# EAGLE board mainboard (EAGLE 7.7.0)
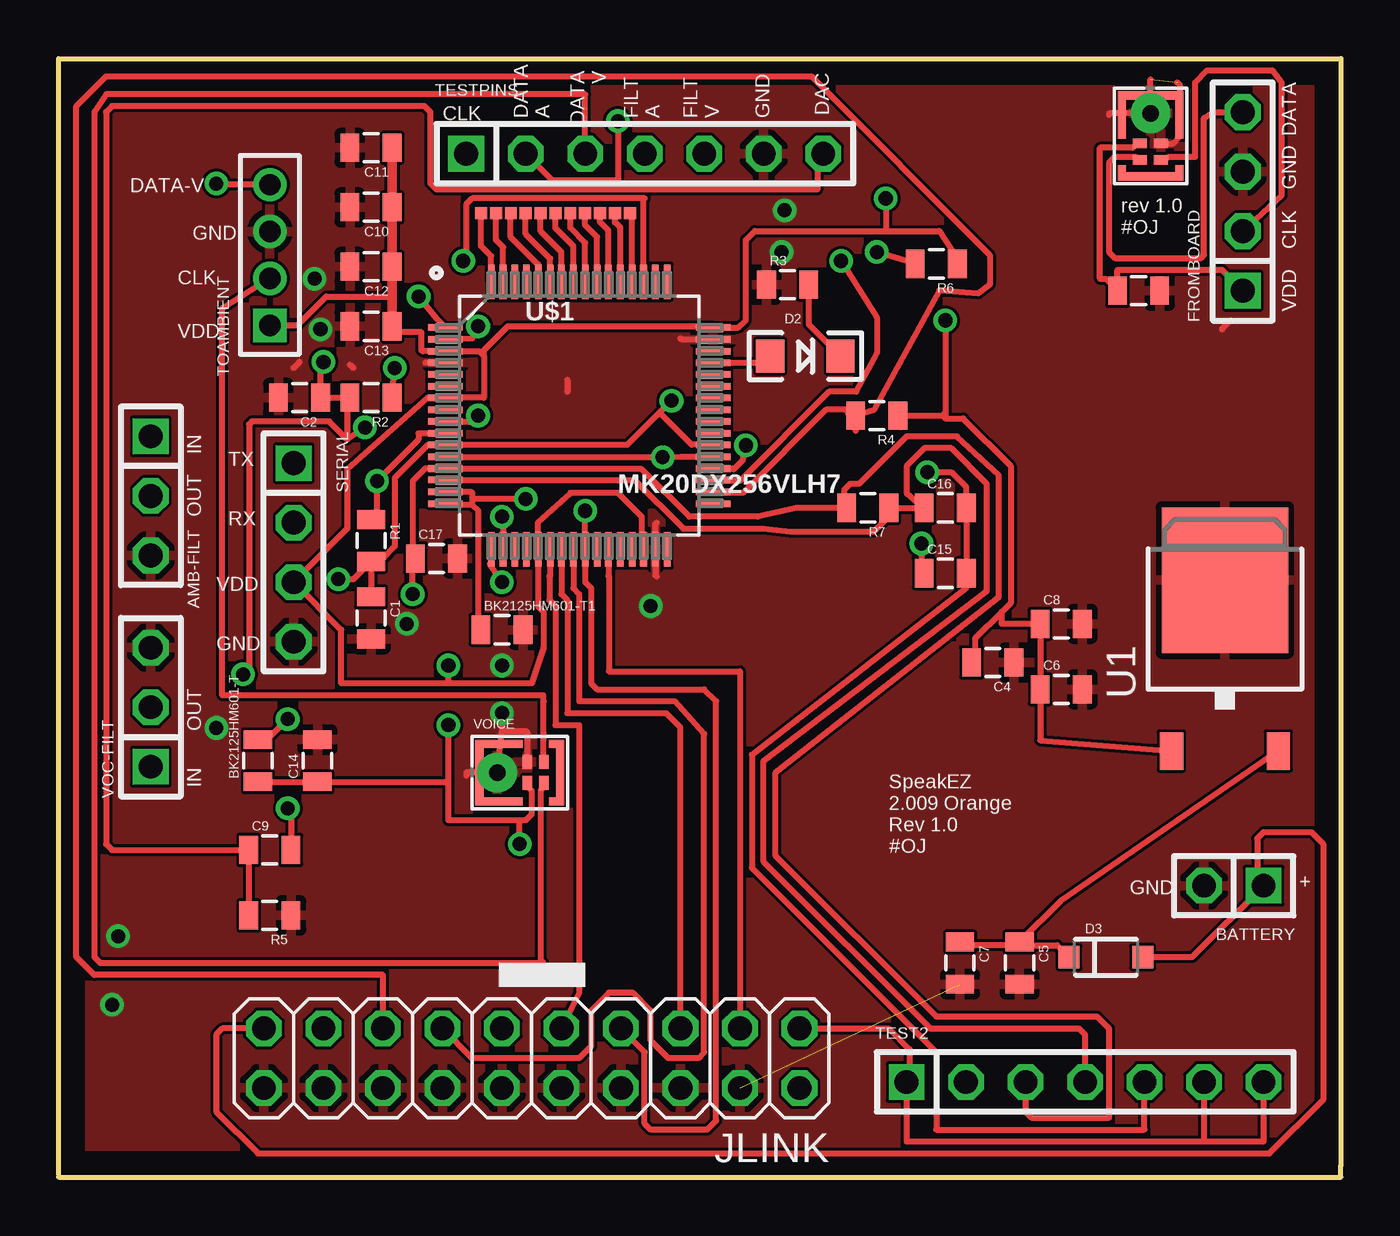
[diagram p0: board, top side]
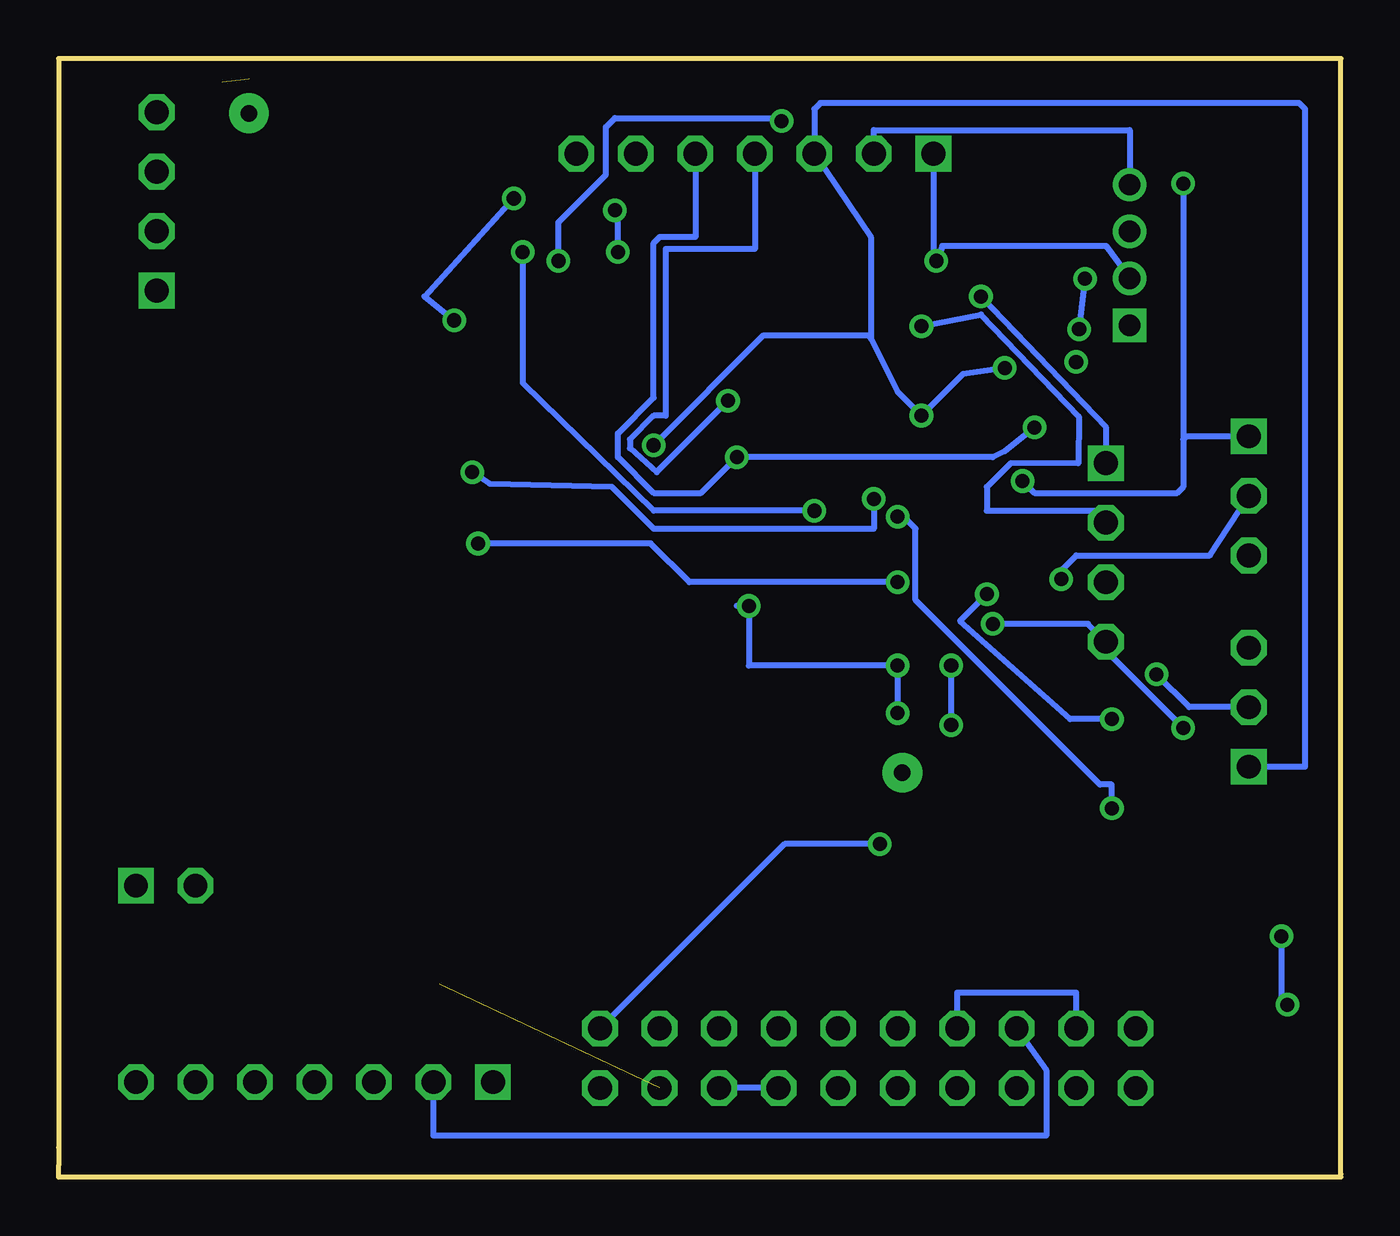
[diagram p1: board, bottom side, seen from below]

Size 54.74 x 47.75 mm. Coordinates in mm from the lower left corner, seen from the top.
Outline: 0,0.13 0,47.75 54.74,47.75 54.74,1.27 54.74,0.51 54.74,0 0,0
Copper layers (1*16): Top 0.035mm / dielectric 1.5mm / Bottom 0.035mm
Design rules "default *": minimum track width 10mil, minimum drill 15mil, track to track 5mil, track to pad 5mil, pad to pad 5mil, via to via 5mil, smd to smd 5mil, copper to edge 40mil, drill to drill 8mil, minimum pad ring 10mil, minimum via ring 8mil, stop-mask expansion 4mil, vias tented up to drill 0mil, thermal gap 10mil

## Footprints (pad centres in the part's own frame; a part is rotated, then mirrored left to right if it is on the bottom)
1X03 = drill 1.016 square: 1 -2.54,0 | drill 1.016 octagon: 2 0,0; 3 2.54,0
ADMP621ACEZ-RL7-RECT = smd 0.4 x 0.6: 1 1.025,0.45; 2 0.325,0.45; 4 0.325,-0.45; 5 1.025,-0.45 | smd 0.051 x 0.051: 3 -1.727,0 | smd 0.35 x 2.1: GND@1 1.725,0; GND@6 -1.725,0 | smd 0.65 x 0.35: GND@2 1.575,1.225; GND@3 1.575,-1.225 | smd 2.025 x 0.35: GND@4 -0.887,-1.225; GND@5 -0.887,1.225 | drill 0.7 pad 1.7: GND@7 -0.965,0
1X02 = drill 1.016 square: 1 -1.27,0 | drill 1.016 octagon: 2 1.27,0
0805 = smd 0.8 x 1.2: 1 -0.9,0; 2 0.9,0
LED-1206 = smd 1.2 x 1.4: A -1.5,0; C 1.5,0
SOD-123 = smd 0.9 x 0.95: A 1.575,0; C -1.575,0
1X04 = drill 1.016 square: 1 -3.81,0 | drill 1.016 octagon: 2 -1.27,0; 3 1.27,0; 4 3.81,0
2X10 = drill 1.016 octagon: 1 -11.43,-1.27; 2 -11.43,1.27; 3 -8.89,-1.27; 4 -8.89,1.27; 5 -6.35,-1.27; 6 -6.35,1.27; 7 -3.81,-1.27; 8 -3.81,1.27; 9 -1.27,-1.27; 10 -1.27,1.27; 11 1.27,-1.27; 12 1.27,1.27; 13 3.81,-1.27; 14 3.81,1.27; 15 6.35,-1.27; 16 6.35,1.27; 17 8.89,-1.27; 18 8.89,1.27; 19 11.43,-1.27; 20 11.43,1.27
1X07 = drill 1.016 square: 1 -7.62,0 | drill 1.016 octagon: 2 -5.08,0; 3 -2.54,0; 4 0,0; 5 2.54,0; 6 5.08,0; 7 7.62,0
1X04M = drill 0.914 square: 1 -3,0 | drill 0.914: 2 -1,0; 3 1,0; 4 3,0
PAD.02X.02 = smd 0.508 x 0.508: P$1 0,0
TO-252 = smd 1 x 1.6: 1 -2.28,-4.8; 2 2.28,-4.8 | smd 5.4 x 6.2: 3 0,2.5
QFP50P1200X1200X160-64N = smd 1.473 x 0.279: 1 -5.715,3.759; 2 -5.715,3.251; 3 -5.715,2.743; 4 -5.715,2.261; 5 -5.715,1.753; 6 -5.715,1.245; 7 -5.715,0.762; 8 -5.715,0.254; 9 -5.715,-0.254; 10 -5.715,-0.762; 11 -5.715,-1.245; 12 -5.715,-1.753; 13 -5.715,-2.261; 14 -5.715,-2.743; 15 -5.715,-3.251; 16 -5.715,-3.759; 33 5.715,-3.759; 34 5.715,-3.251; 35 5.715,-2.743; 36 5.715,-2.261; 37 5.715,-1.753; 38 5.715,-1.245; 39 5.715,-0.762; 40 5.715,-0.254; 41 5.715,0.254; 42 5.715,0.762; 43 5.715,1.245; 44 5.715,1.753; 45 5.715,2.261; 46 5.715,2.743; 47 5.715,3.251; 48 5.715,3.759 | smd 0.279 x 1.473: 17 -3.759,-5.715; 18 -3.251,-5.715; 19 -2.743,-5.715; 20 -2.261,-5.715; 21 -1.753,-5.715; 22 -1.245,-5.715; 23 -0.762,-5.715; 24 -0.254,-5.715; 25 0.254,-5.715; 26 0.762,-5.715; 27 1.245,-5.715; 28 1.753,-5.715; 29 2.261,-5.715; 30 2.743,-5.715; 31 3.251,-5.715; 32 3.759,-5.715; 49 3.759,5.715; 50 3.251,5.715; 51 2.743,5.715; 52 2.261,5.715; 53 1.753,5.715; 54 1.245,5.715; 55 0.762,5.715; 56 0.254,5.715; 57 -0.254,5.715; 58 -0.762,5.715; 59 -1.245,5.715; 60 -1.753,5.715; 61 -2.261,5.715; 62 -2.743,5.715; 63 -3.251,5.715; 64 -3.759,5.715

## Placement (x,y rotation side)
AMB-FILT  [1X03]  3.94,29.08 270 top
AMBIENT  ADMP621ACEZ-RL7-RECT  [ADMP621ACEZ-RL7-RECT]  46.61,44.45 270 top
BATTERY  [1X02]  50.16,12.45 180 top
BK2125HM601-T  [0805]  8.51,17.78 90 top
BK2125HM601-T1  [0805]  18.92,23.37 0 top
C1  100pf  [0805]  13.34,23.88 270 top
C2  100pf  [0805]  10.29,33.27 180 top
C3  0.1uF  [0805]  46.1,37.85 0 top
C4  0.1uF  [0805]  39.88,21.97 180 top
C5  2.2uF  [0805]  41.02,9.14 270 top
C6  2.2uF  [0805]  42.8,20.83 0 top
C7  0.1uF  [0805]  38.48,9.14 270 top
C8  0.1uF  [0805]  42.8,23.62 0 top
C9  [0805]  9.02,13.97 0 top
C10  0.1uF  [0805]  13.34,41.4 180 top
C11  0.1uF  [0805]  13.34,43.94 180 top
C12  0.1uF  [0805]  13.34,38.86 180 top
C13  2.2uF  [0805]  13.34,36.32 180 top
C14  0.1uF  [0805]  11.05,17.78 90 top
C15  0.1uF  [0805]  37.85,25.78 0 top
C16  0.1uF  [0805]  37.85,28.57 0 top
C17  2.2uF  [0805]  16.13,26.42 0 top
D2  [LED-1206]  31.88,35.05 0 top
D3  1N5819HW-7-F  [SOD-123]  44.7,9.4 0 top
FROMBOARD  [1X04]  50.55,41.66 90 top
JLINK  JLINK  [2X10]  20.19,5.08 180 top
R1  5kohm  [0805]  13.34,27.18 270 top
R2  5kohm  [0805]  13.34,33.27 180 top
R3  66 ohms  [0805]  31.11,38.1 0 top
R4  10k  [0805]  34.92,32.51 180 top
R5  50k  [0805]  9.02,11.18 180 top
R6  100k  [0805]  37.47,38.99 180 top
R7  470  [0805]  34.54,28.57 180 top
SERIAL  [1X04]  10.03,26.67 270 top
TEST2  [1X07]  43.81,4.06 0 top
TESTPINS  [1X07]  25.02,43.69 0 top
TOAMBIENT  [1X04M]  9.02,39.37 90 top
TP1  TEST-POINT2  [PAD.02X.02]  23.11,41.15 0 top
TP2  TEST-POINT2  [PAD.02X.02]  22.48,41.15 90 top
TP3  TEST-POINT2  [PAD.02X.02]  21.84,41.15 90 top
TP4  TEST-POINT2  [PAD.02X.02]  21.21,41.15 90 top
TP5  TEST-POINT2  [PAD.02X.02]  20.57,41.15 90 top
TP6  TEST-POINT2  [PAD.02X.02]  23.75,41.15 90 top
TP7  TEST-POINT2  [PAD.02X.02]  24.38,41.15 90 top
TP8  TEST-POINT2  [PAD.02X.02]  19.94,41.15 90 top
TP9  TEST-POINT2  [PAD.02X.02]  19.3,41.15 90 top
TP10  TEST-POINT2  [PAD.02X.02]  18.03,41.15 90 top
TP11  TEST-POINT2  [PAD.02X.02]  18.67,41.15 90 top
U1  +12v  [TO-252]  49.78,22.99 0 top
U$1  MK20DX256VLH7  [QFP50P1200X1200X160-64N]  22.23,32.51 0 top
VOC-FILT  [1X03]  3.94,20.07 90 top
VOICE  ADMP621ACEZ-RL7-RECT  [ADMP621ACEZ-RL7-RECT]  19.68,17.27 0 top

## Library data of the parts
AMB-FILT BATTERY FROMBOARD JLINK SERIAL TEST2 TESTPINS TOAMBIENT VOC-FILT = pinhead
AMBIENT VOICE = InvenSense-INMP621ACEZ-R7-rect; MPN: ADMP621ACEZ-RL7; OC_FARNELL: 2361525; OC_NEWARK: 08X1061; PACKAGE: 5LGA; SUPPLIER: ANALOG DEVICES
BK2125HM601-T BK2125HM601-T1 R1-R7 TP1-TP11 = SparkFun-Passives
C1-C17 = SparkFun-Capacitors
D2 = SparkFun-LED
D3 = SparkFun-DiscreteSemi
U1 = LP38691; PROD_ID: VREG-12370
U$1 = Teensy_DIY_v1.0

## Nets
+5V: BATTERY.1 D3.A JLINK.19
CLK: TESTPINS.1 TOAMBIENT.2 U$1.51 VOICE.1
CLK2-A: AMBIENT.1 FROMBOARD.2
DATA: R2.1 TESTPINS.3 U$1.9 U$1.36 VOC-FILT.1 VOICE.5
DATA2: AMB-FILT.1 R1.1 TESTPINS.2 TOAMBIENT.4 U$1.10 U$1.35
DATA2-A: AMBIENT.5 FROMBOARD.4
GND: AMB-FILT.3 AMBIENT.2 AMBIENT.3 AMBIENT.GND@7 BATTERY.2 BK2125HM601-T1.2 C1.2 C2.2 C3.2 C4.1 C5.2 C6.2 C7.2 C8.2 C10.2 C11.2 C12.2 C13.2 C14.2 C17.2 FROMBOARD.3 JLINK.4 JLINK.6 JLINK.8 JLINK.10 JLINK.12 JLINK.14 JLINK.16 JLINK.18 JLINK.20 R3.1 R5.1 SERIAL.4 TESTPINS.6 TOAMBIENT.3 U1.3 U$1.4 U$1.31 U$1.47 VOC-FILT.3 VOICE.2 VOICE.3 VOICE.GND@7
N$1: AMB-FILT.2 C1.1 R1.2 TESTPINS.4 U$1.11 U$1.38
N$2: C2.1 R2.2 TESTPINS.5 U$1.12 U$1.37 VOC-FILT.2
N$3: TP7.P$1 U$1.52
N$4: TP6.P$1 U$1.53
N$5: TP1.P$1 U$1.54
N$6: TP2.P$1 U$1.55
N$7: TP3.P$1 U$1.56
N$8: TP4.P$1 U$1.57
N$9: TP5.P$1 U$1.58
N$10: TP8.P$1 U$1.59
N$12: TP9.P$1 U$1.60
N$13: JLINK.5 U$1.23
N$14: JLINK.9 U$1.22
N$15: C5.1 C7.1 D3.C U1.2
N$16: JLINK.3 U$1.27
N$17: D2.A U$1.45
N$18: TP10.P$1 U$1.64
N$19: D2.C R3.2
N$20: BK2125HM601-T1.1 C15.2 C16.2 TEST2.5 U$1.15 U$1.16
N$21: TP11.P$1 U$1.63
N$22: C16.1 R7.1 TEST2.4 U$1.14
N$23: JLINK.13 JLINK.17 U$1.24
N$24: JLINK.7 R6.2 U$1.25
N$25: SERIAL.1 U$1.1
N$26: SERIAL.2 U$1.2
N$27: C9.2 U$1.18
N$28: C9.1 R5.2 TESTPINS.7
N$30: BK2125HM601-T.2 C17.1 R7.2 TEST2.3 U$1.13
N$31: C15.1 U$1.17
RESET: JLINK.15 R4.2 TEST2.2 U$1.34
VDD-DECOUP: BK2125HM601-T.1 C4.2 C6.1 C8.1 C10.1 C11.1 C12.1 C13.1 C14.1 JLINK.1 R4.1 R6.1 SERIAL.3 TEST2.1 TEST2.6 TEST2.7 TOAMBIENT.1 U1.1 U$1.3 U$1.7 U$1.21 U$1.30 U$1.48 VOICE.4
VDD-DECOUP-A: AMBIENT.4 C3.1 FROMBOARD.1

## Tracks (layer width: path | path; a pad name or v marks a point on that pad's centre or on a via)
+5V
  Top 0.254: JLINK.19 6.99,6.35 6.73,6.1 6.73,2.79 8.51,1.02 51.69,1.02 53.98,3.3 53.98,14.22 53.47,14.73 51.44,14.73 51.16,14.46 51.16,12.72 BATTERY.1 48.39,9.4 D3.A
CLK  (via drill 0.6)
  Top 0.254: VOICE.1 20.71,20.31 20.7,20.57 6.99,20.57 6.99,37.1 TOAMBIENT.2 | U$1.51 24.97,41.73 25.02,41.78 17.65,41.78 17.4,41.53 17.4,39.24 v17.27,39.12
  Bottom 0.254: TOAMBIENT.2 10.02,39.75 17.02,39.75 v17.27,39.12 17.4,39.24 TESTPINS.1
CLK2-A
  Top 0.254: AMBIENT.1 47.23,43.43 47.37,43.56 48.51,43.56 48.51,46.74 49.02,47.24 51.82,47.24 52.2,46.74 52.2,41.91 FROMBOARD.2
DATA  (via drill 0.6)
  Top 0.254: R2.1 14.23,33.41 v14.35,34.54 | U$1.9 17.65,32.26 v17.91,32.51 | U$1.36 28.8,30.25 28.83,30.23 29.21,30.61 v29.34,31.24 | TESTPINS.3 22.48,46.23 2.03,46.23 1.52,45.47 1.52,9.4 1.78,9.14 20.7,9.14 20.57,9.27 20.57,16.51 20.71,16.65 VOICE.5
  Bottom 0.254: v14.35,34.54 16.13,34.29 v17.91,32.51 18.92,33.53 20.07,35.81 | 20.07,35.81 20.07,40.13 TESTPINS.3 22.48,45.59 22.23,45.85 1.78,45.85 1.52,45.59 1.52,17.53 VOC-FILT.1 | v29.34,31.24 24.64,35.94 20.19,35.94 20.07,35.81
DATA2  (via drill 0.6)
  Top 0.254: U$1.10 15.37,31.75 15.37,31.5 v13.59,29.72 13.59,28.33 R1.1 | 9.02,42.42 TOAMBIENT.4 6.78,42.37 v6.73,42.42 | v33.4,39.12 34.92,36.7 34.92,35.18 34.04,33.53 32.89,33.53 29.08,29.72 27.99,29.72 U$1.35 | v23.88,45.09 23.88,42.55 21.08,42.55 TESTPINS.2
  Bottom 0.254: v6.73,42.42 6.73,31.5 | 6.73,31.5 6.73,29.46 6.99,29.21 13.08,29.21 v13.59,29.72 | TESTPINS.2 19.94,44.7 9.02,44.7 TOAMBIENT.4 | AMB-FILT.1 6.6,31.62 6.73,31.5 | v33.4,39.12 33.4,40.77 31.37,42.8 31.37,44.83 30.99,45.21 24,45.21 v23.88,45.09
DATA2-A
  Top 0.254: FROMBOARD.4 49.28,45.47 48.9,45.21 48.9,39.37 48.77,39.24 45.09,39.24 44.83,39.5 44.83,43.31 45.09,43.56 45.97,43.56 46.1,43.43 AMBIENT.5 | AMBIENT.5 46.23,43.43 | AMBIENT.5
GND  (via drill 0.6)  (2 unrouted)
  Top 0.254: U$1.47 26.59,35.76 26.54,35.81 | 25.53,27.94 25.48,27.89 U$1.31 25.48,25.7 25.53,25.65 | VOICE.2 20.01,18.98 19.94,19.05 18.92,19.05 | 21.72,34.04 21.72,33.53 | 12.44,34.68 12.57,34.54 | 10.29,34.8 10.03,34.54 | U$1.4 15.65,34.77 | v18.92,19.81 18.92,19.05 | 49.66,36.2 50.04,36.58 | AMBIENT.2 47.55,44.12 47.88,44.45 47.88,46.61 47.75,46.74 | 18.92,19.05 VOICE.GND@7 VOICE.3 17.4,17.27 17.4,17.14 | 46.61,46.86 AMBIENT.3 AMBIENT.GND@7 44.83,45.41 44.83,45.34
  Bottom 0.254: v14.86,23.62 10.79,23.62 SERIAL.4 10.03,22.48 v6.73,19.18 | 25.78,24.38 v25.27,24.38 25.27,21.84 v18.92,21.84 v18.92,19.81 | v30.86,39.5 30.86,41.15 v30.99,41.28 | v10.92,38.35 v11.18,36.2 | v2.54,10.29 2.54,7.62 v2.29,7.37 | JLINK.8 JLINK.6
  pour Top: -1.02,49.28 -1.27,-1.14 59.18,-1.02 59.44,49.4
N$1  (via drill 0.6)
  Top 0.254: R1.2 C1.1 | R1.2 13.47,26.42 13.84,26.42 14.35,26.92 14.35,29.84 15.77,31.27 U$1.11 24.28,31.27 25.65,32.64 | v11.94,25.53 12.58,25.53 R1.2 | 25.65,32.64 v26.16,33.15 | U$1.38 27.03,31.27 25.65,32.64
  Bottom 0.254: TESTPINS.4 25.02,39.62 28.83,39.62 28.83,32.51 29.34,32.51 30.35,31.5 30.35,31.11 29.21,30.1 v26.16,33.15 | v11.94,25.53 11.94,25.91 11.3,26.54 5.59,26.54 AMB-FILT.2
N$2  (via drill 0.6)
  Top 0.254: U$1.12 17.04,30.73 v25.78,30.73 26.57,30.76 U$1.37 | v11.3,34.8 11.19,34.68 C2.1 R2.2 12.32,33.16 12.32,31.5 | v13.08,32 12.32,31.5 | 12.32,31.5 11.56,32.26 8.26,32.26 8.13,32.13 8.13,21.72 v7.87,21.46
  Bottom 0.254: v13.08,32 14.35,30.99 14.86,30.73 v25.78,30.73 27.3,29.21 29.34,29.21 30.86,30.73 30.86,31.75 29.34,33.27 29.34,39.88 29.08,40.13 27.56,40.13 TESTPINS.5 | VOC-FILT.2 6.48,20.07 v7.87,21.46
N$3
  Top 0.254: U$1.52 24.49,40.92 TP7.P$1
N$4
  Top 0.254: U$1.53 23.98,40.54 23.75,40.77 TP6.P$1
N$5
  Top 0.254: U$1.54 23.47,40.41 23.11,40.77 TP1.P$1
N$6
  Top 0.254: U$1.55 22.99,40.13 22.48,40.64 TP2.P$1
N$7
  Top 0.254: U$1.56 22.48,39.88 21.84,40.51 TP3.P$1
N$8
  Top 0.254: U$1.57 21.97,39.75 21.21,40.51 TP4.P$1
N$9
  Top 0.254: U$1.58 21.46,39.5 20.57,40.39 TP5.P$1
N$10
  Top 0.254: U$1.59 20.98,39.22 19.94,40.26 TP8.P$1
N$12
  Top 0.254: U$1.60 20.47,38.96 19.3,40.13 TP9.P$1
N$13
  Top 0.254: U$1.23 21.46,24.89 21.72,24.64 21.72,19.81 25.93,19.81 26.54,19.19 JLINK.5
N$14
  Top 0.254: U$1.22 20.98,25.68 20.95,25.65 20.95,24.64 21.21,24.38 21.21,19.3 22.23,19.3 22.23,7.87 JLINK.9
N$15
  Top 0.254: 40.77,9.91 40.91,10.04 C5.1 42.77,11.8 U1.2 | 40.77,9.91 38.62,9.91 C7.1 | 40.77,9.91 42.62,9.91 D3.C
N$16
  Top 0.254: U$1.27 23.47,25.68 23.5,25.65 23.5,21.59 29.08,21.59 JLINK.3
N$17
  Top 0.254: U$1.45 30.1,34.77 D2.A
N$18
  Top 0.254: U$1.64 18.47,39.32 18.03,39.75 TP10.P$1
N$19
  Top 0.254: R3.2 32.02,36.41 D2.C
N$20  (via drill 0.6)
  Top 0.254: U$1.15 17.6,29.26 17.65,29.21 17.65,28.96 | 17.65,28.96 17.65,28.7 | 17.65,28.7 16.56,28.7 U$1.16 | 17.65,28.7 17.91,28.45 17.91,23.48 BK2125HM601-T1.1 | v37.08,30.1 38.1,30.1 38.75,29.45 C16.2 C15.2 38.75,25.16 29.59,18.03 29.59,13.21 37.47,5.33 37.47,2.03 46.35,2.03 TEST2.5 | v19.94,28.96 17.65,28.96
  Bottom 0.254: v19.94,28.96 19.94,27.69 29.34,27.69 31.11,29.46 36.32,29.59 v37.08,30.1
N$21
  Top 0.254: U$1.63 18.97,39.7 18.67,40.01 TP11.P$1
N$22
  Top 0.254: U$1.14 24.59,29.77 26.67,27.69 30.1,27.69 31.24,27.56 34.8,27.56 35.31,28.07 35.31,28.44 R7.1 C16.1 36.2,29.2 36.2,30.35 36.96,31.11 38.1,31.11 39.62,29.59 39.62,25.02 30.1,17.78 30.1,13.46 37.21,6.35 43.56,6.35 43.81,6.1 TEST2.4
N$23
  Top 0.254: JLINK.13 17.65,5.08 22.23,5.08 22.73,5.59 22.73,7.11 23.5,7.87 24.51,7.87 25.27,7.11 25.27,5.84 26.04,5.08 27.3,5.08 27.56,5.33 27.56,18.92 26.29,20.32 22.23,20.32 22.23,24.89 21.97,25.15 U$1.24
  Bottom 0.254: JLINK.17 11.3,7.87 16.38,7.87 JLINK.13
N$24  (via drill 0.6)
  Top 0.254: R6.2 v34.92,39.5 | v22.48,28.45 U$1.25 22.48,25.4 22.73,25.15 22.73,21.08 22.99,20.83 27.56,20.83 28.07,20.32 28.07,2.41 27.69,2.03 25.27,2.03 25.02,2.29 25.02,5.33 JLINK.7
  Bottom 0.254: v22.48,28.45 29.34,28.45 34.92,33.91 v34.92,39.5
N$25  (via drill 0.6)
  Top 0.254: v15.37,37.59 16.13,36.65 U$1.1
  Bottom 0.254: SERIAL.1 10.02,31.99 v15.37,37.59
N$26  (via drill 0.6)
  Top 0.254: U$1.2 17.65,35.81 v17.91,36.32
  Bottom 0.254: v17.91,36.32 15.37,36.83 11.19,32.47 11.21,30.47 14.1,30.48 15.11,29.46 15.11,28.45 10.54,28.45 SERIAL.2
N$27  (via drill 0.6)
  Top 0.254: v18.92,28.19 18.97,28.14 U$1.18 | v9.78,15.75 9.92,15.61 C9.2
  Bottom 0.254: v18.92,28.19 18.67,28.19 18.16,27.69 18.16,24.64 10.29,16.76 9.78,16.76 v9.78,15.75
N$28
  Top 0.254: R5.2 C9.1 2.29,13.97 2.03,14.22 2.03,45.47 2.29,45.72 15.62,45.72 15.88,45.47 15.88,42.42 16.13,42.16 32.38,42.16 32.38,43.43 TESTPINS.7
N$30  (via drill 0.6)
  Top 0.254: BK2125HM601-T.2 8.9,18.68 v9.78,19.56 | TEST2.3 41.27,2.79 41.53,2.54 44.83,2.54 44.83,6.35 44.32,6.86 37.47,6.86 30.61,13.72 30.61,17.27 40.13,24.77 40.13,29.97 38.35,31.62 36.2,31.62 34.16,29.59 33.78,29.59 33.53,29.34 33.53,28.69 R7.2 31.5,28.57 29.84,28.19 26.92,28.19 24.89,30.23 17.04,30.23 U$1.13 15.65,30.25 15.11,29.72 15.11,26.53 C17.1 15.11,26.3 v15.11,24.89
  Bottom 0.254: v9.78,19.56 11.56,19.56 16.26,23.75 v15.11,24.89
N$31  (via drill 0.6)
  Top 0.254: v18.92,25.4 18.41,26.16 18.47,26.21 U$1.17 | v36.83,27.05 36.83,25.9 C15.1
  Bottom 0.254: v18.92,25.4 27.81,25.4 29.46,27.05 v36.83,27.05
RESET
  Top 0.254: U$1.34 27.99,29.21 29.21,29.21 32.77,32.77 33.66,32.77 34.02,31.87 R4.2 34.8,32.76 37.59,37.85 39.24,37.72 39.75,38.1 39.75,39.37 32.13,46.99 2.03,46.99 0.76,45.72 0.76,9.4 1.52,8.64 13.84,8.64 JLINK.15
  Bottom 0.254: JLINK.15 12.57,4.57 12.57,1.78 38.73,1.78 TEST2.2
VDD-DECOUP  (via drill 0.6)
  Top 0.254: 18.16,35.05 17.96,35.26 U$1.3 15.54,35.26 15.49,35.31 15.49,36.07 14.49,36.07 C13.1 14.36,36.2 | 18.16,35.05 18.16,33.27 U$1.7 15.75,33.27 12.32,30.23 12.32,27.69 SERIAL.3 12.06,23.37 12.06,21.08 16.64,21.08 | 18.16,35.05 18.16,35.31 19.18,36.32 27.89,36.32 U$1.48 29.03,36.27 29.34,36.58 29.34,40.01 29.72,40.39 35.31,40.39 | 35.31,40.39 37.59,40.39 38.35,39.24 38.37,39.23 R6.1 | 16.64,21.08 20.19,21.08 20.7,22.61 20.7,24.13 20.47,24.36 U$1.21 20.45,26.82 20.45,27.94 21.84,29.21 23.88,29.21 24.89,28.19 24.89,27.56 24.97,27.48 U$1.30 | 19.68,15.24 16.64,15.24 16.64,16.76 | v16.64,21.84 16.64,21.08 | v16.64,19.3 16.64,16.76 | BK2125HM601-T.1 C14.1 16.52,16.88 16.64,16.76 | 48.9,1.52 36.2,1.52 TEST2.1 36.32,4.19 36.32,5.46 35.43,6.35 JLINK.1 | 48.9,1.52 51.44,1.52 TEST2.7 | TEST2.6 48.9,1.52 | 19.68,15.24 19.94,15.24 20.19,15.49 20.19,16.51 20.01,16.69 VOICE.4 | v19.68,14.22 19.68,15.24 | 35.94,32 R4.1 37.72,32.51 37.85,32.64 | 40.26,24.13 40.64,24.51 40.64,30.35 38.61,32.39 37.85,32.39 37.85,32.64 | 40.26,24.13 39.12,22.99 39.12,22.11 C4.2 | v35.31,41.78 35.31,40.39 | v37.85,36.58 37.85,32.64 | U1.1 41.9,18.65 C6.1 C8.1 40.26,23.62 40.26,24.13 | TOAMBIENT.1 10.21,36.37 11.43,37.59 14.11,37.59 14.23,37.72
  Top 0.406: C11.1 C10.1 C12.1 14.23,37.72 C13.1
  Bottom 0.254: v16.64,19.3 v16.64,21.84 | v19.68,14.22 23.75,14.22 JLINK.1 | v37.85,36.58 39.12,37.59 v35.31,41.78
VDD-DECOUP-A
  Top 0.254: FROMBOARD.1 49.66,38.73 45.21,38.73 45.2,38.72 C3.1 44.69,38.35 44.45,38.35 44.45,43.94 45.85,43.94 46.03,44.12 AMBIENT.4

## Text on the board
tPlace: DATA / V | CLK | DATA / A | FILT / A | FILT / V | GND | DAC | DATA | DATA-V | GND | GND | CLK | CLK | VDD | VDD | IN | TX | OUT | RX | VDD | GND | OUT | IN | GND | +
tNames: rev 1.0 / #OJ | SpeakEZ / 2.009 Orange / Rev 1.0 / #OJ